# Altium PCB PCB1.PcbDoc
Units mm, origin at the board's own origin, x right, y up, seen from the top; angles counter-clockwise.
Board outline 100 x 100 mm, 2 copper layers (Top Layer, Bottom Layer); 47 components, 30 nets, 179 pads, 1 vias.
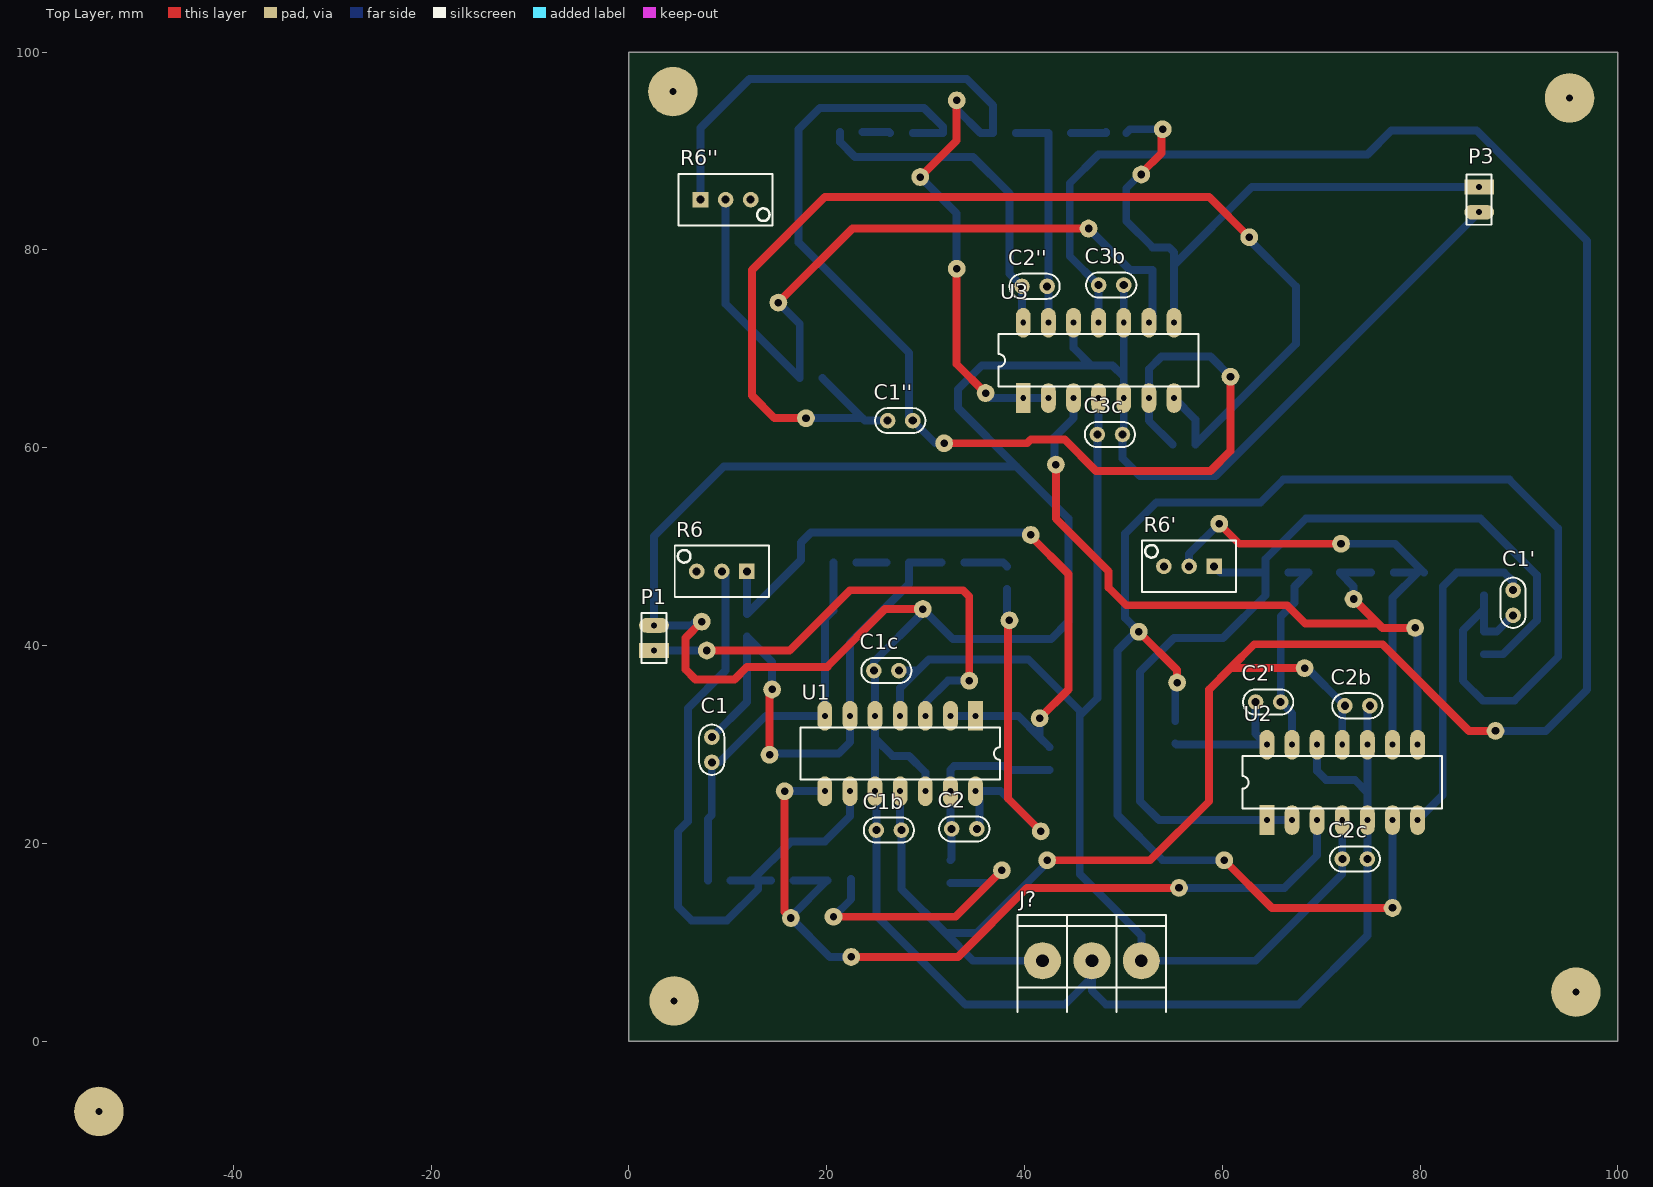
[diagram p0: Top Layer view]
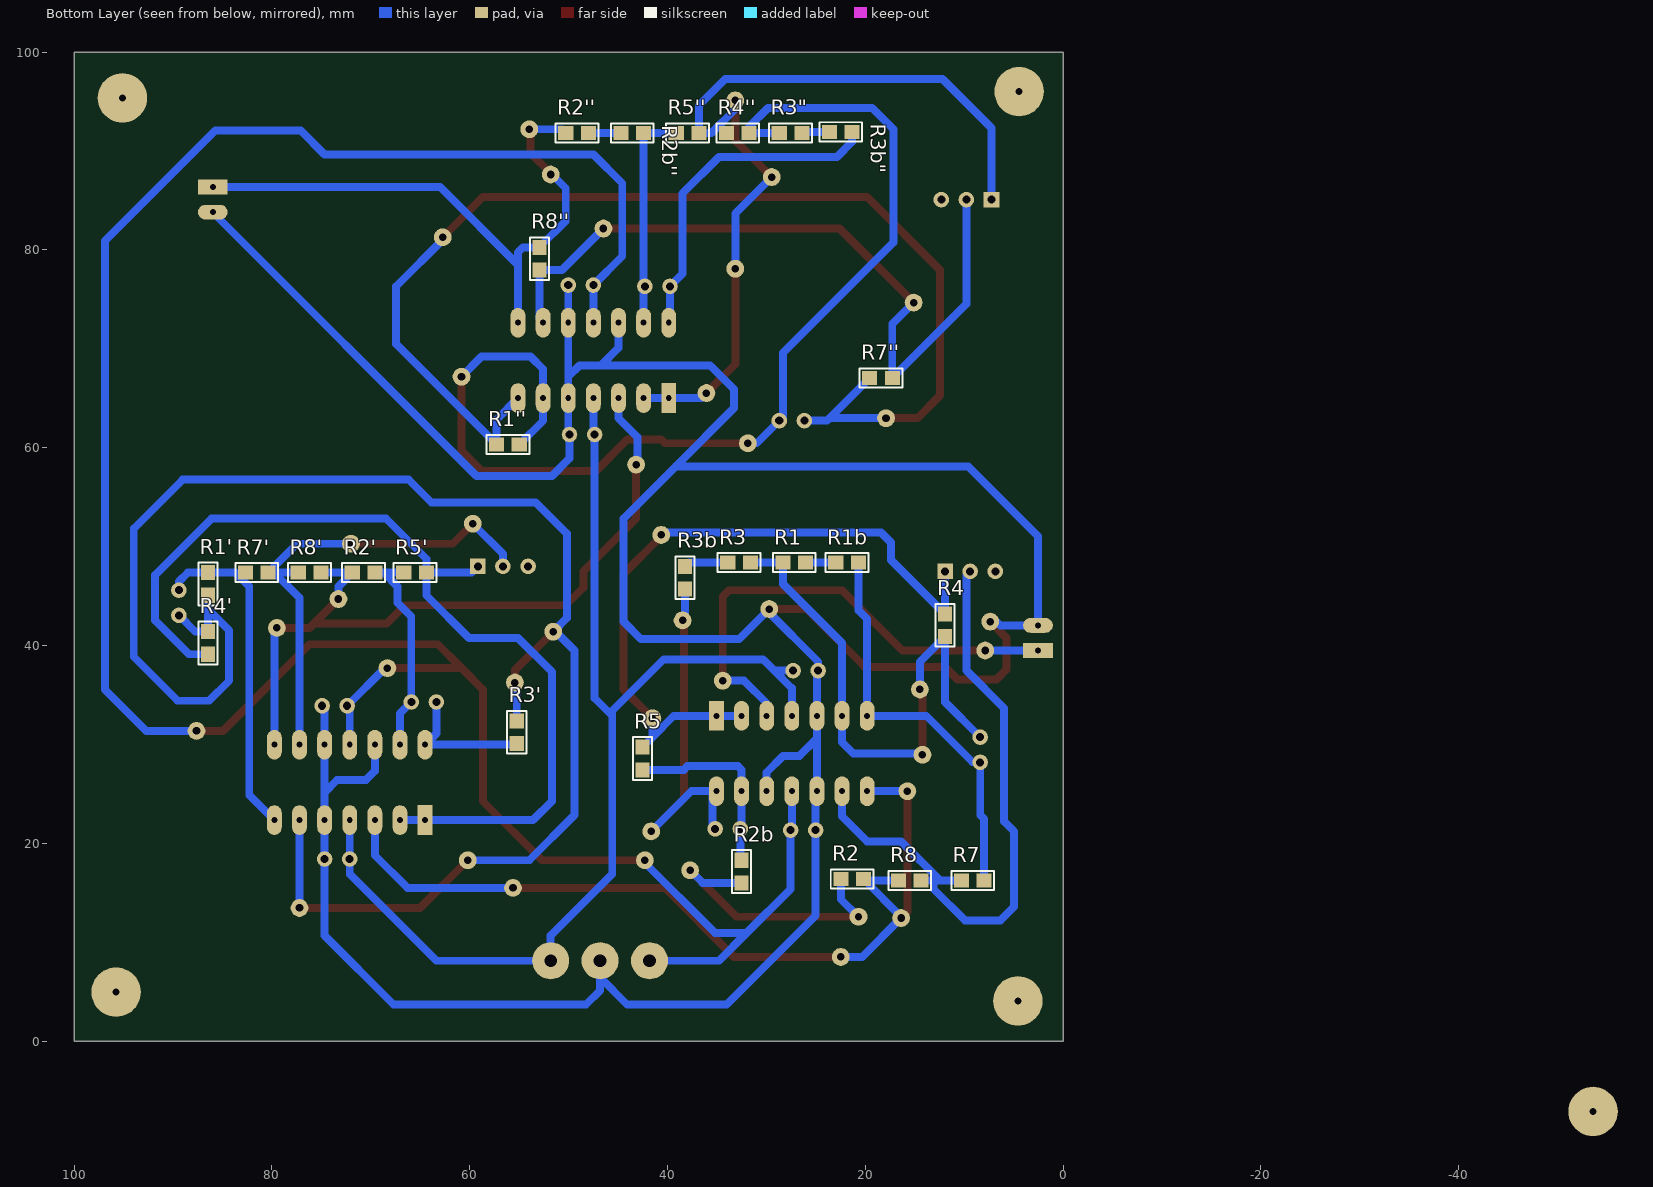
[diagram p1: Bottom Layer view, seen from below]
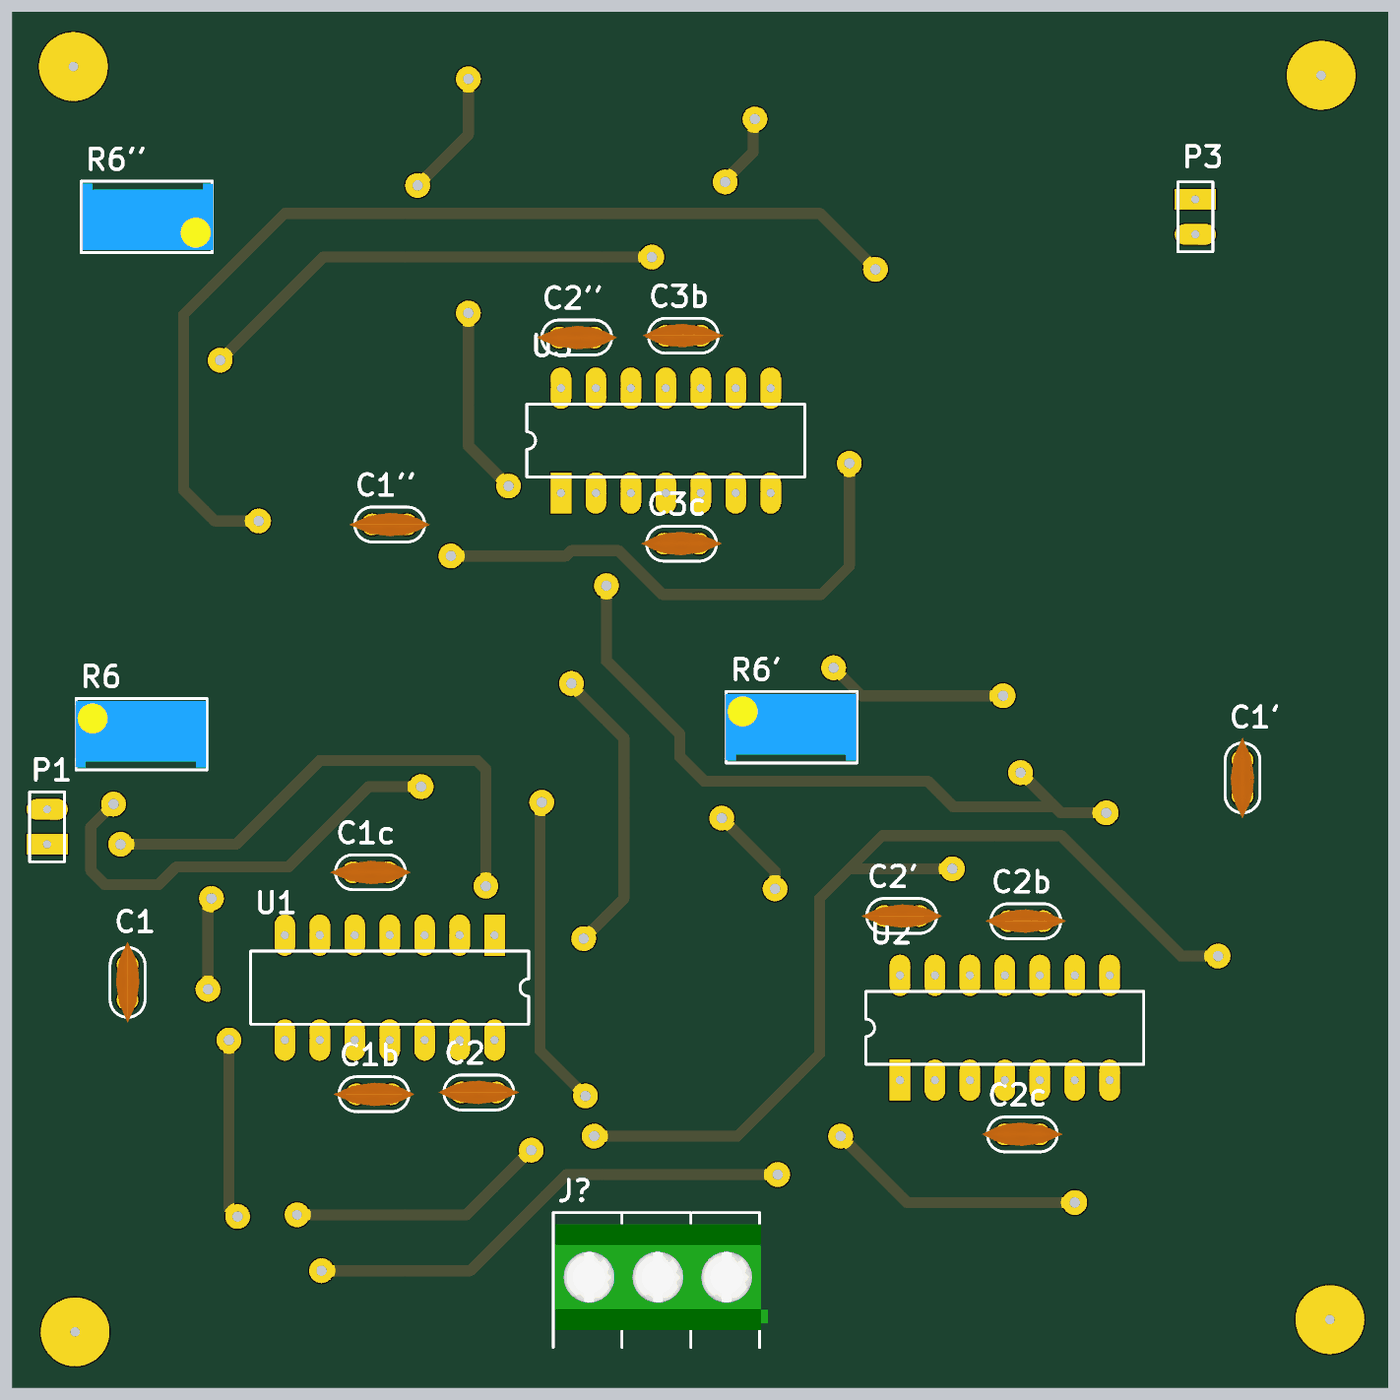
[diagram p2: 3D render of the assembled board from above, using the file's embedded part models]
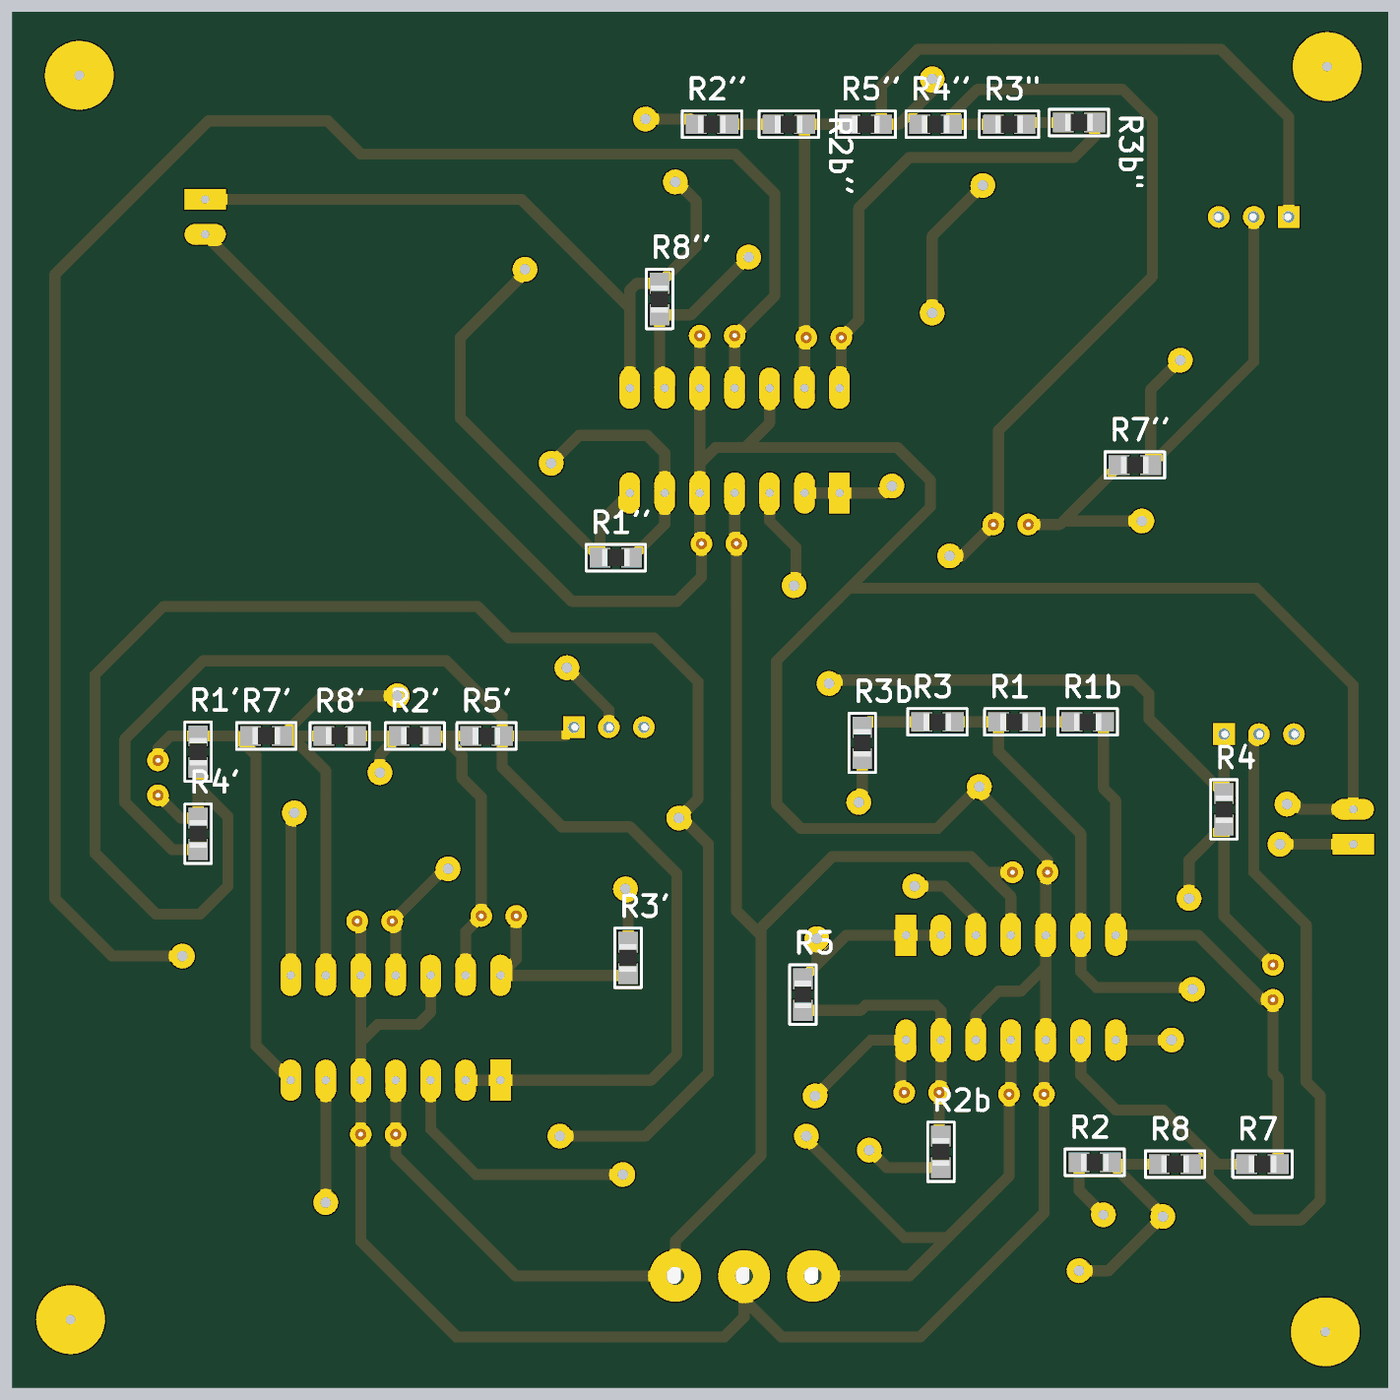
[diagram p3: 3D render of the assembled board from below, using the file's embedded part models]

## Layer stack, top to bottom
Top Solder: solder mask 0.0102, Solder Resist, Dk 3.5
Top Layer: signal copper 0.0356
Dielectric 1: dielectric 0.32, FR-4, Dk 4.8
Bottom Layer: signal copper 0.0356
Bottom Solder: solder mask 0.0102, Solder Resist, Dk 3.5

## Board outline
100,0 100,100 0,100 0,0

## Design rules (kind name [scope] priority, off if disabled: settings)
Clearance [All] p1: gap=0.3 ignorepadtopadclearanceinfootprint=FALSE
PolygonConnect [All] p1: connectstyle=Relief reliefconductorwidth=0.254 reliefentries=4 polygonreliefangle="90 Angle" airgapwidth=0.254
RoutingVias [All] p1: holewidth=0.5 width=2 viastyle="Through Hole" minholewidth=0.3 minwidth=1.5 maxholewidth=0.5 maxwidth=2
SolderMaskExpansion [All] p1: expansion=0.102
Width [All] p1: maxlimit=0.8 minlimit=0.8 preferedwidth=0.8
30 further rules are at their usual default settings.

## Classes and differential pairs
component class Sheet1: C1 C1b C1c C2 C2b C2c C3b C3c J? P1 R1 R1b R2 R2b R3 R3b R4 R5 R6 R7 R8 U1
component class Sheet2: C1' C2' R1' R2' R3' R4' R5' R6' R7' R8' U2
component class Sheet3: C1'' C2'' P3 R1'' R2'' R2b'' "R3\"" "R3b\"" R4'' R5'' R6'' R7'' R8'' U3

## Components (designator, comment, footprint, x,y, rotation, side; value= is the part's Value field where it differs from the comment)
C1 "1n" CAP100 8.382,29.464 r270 top
C1' "4.7n" CAP100 89.408,44.323 r90 top
C1'' "1n" CAP100 27.432,62.738 r180 top
C1b "100n" CAP100 26.289,21.336 r180 top
C1c "100n" CAP100 26.035,37.465 r180 top
C2 "1n" CAP100 33.909,21.463 r0 top
C2' "4.7n" CAP100 64.643,34.29 r180 top
C2'' "1n" CAP100 41.021,76.327 r180 top
C2b "100n" CAP100 73.66,33.909 r0 top
C2c "100n" CAP100 73.406,18.415 r0 top
C3b "100n" CAP100 48.768,76.454 r0 top
C3c "100n" CAP100 48.641,61.341 r0 top
J? "BORNERA ALIMENTACION" BORNERA3 46.816,8.128 r270 top
P1 "Signal IN" HDR1X2 2.54,39.497 r90 top
P3 "signal OUT" HDR1X2 85.979,86.36 r270 top
R1 "15K" 0805 27.178,48.387 r180 bottom
R1' "5.6k" 0805 86.487,46.228 r90 bottom
R1'' "20k" 0805 56.134,60.325 r0 bottom
R1b "1.3K" 0805 21.844,48.387 r180 bottom
R2 "3K" 0805 21.336,16.383 r0 bottom
R2' "680" 0805 70.739,47.371 r180 bottom
R2'' "2.7k" 0805 49.149,91.821 r180 bottom
R2b "82" 0805 32.512,17.145 r90 bottom
R2b'' "100" 0805 43.561,91.821 r180 bottom
R3 "3K" 0805 32.766,48.387 r0 bottom
"R3\"" "2.7k" 0805 27.559,91.821 r180 bottom
R3' "680" 0805 55.245,31.242 r270 bottom
R3b "82" 0805 38.227,46.863 r270 bottom
"R3b\"" "100" 0805 22.479,91.948 r180 bottom
R4 "20K" 0805 11.938,42.037 r270 bottom
R4' "7.5k" 0805 86.487,40.259 r90 bottom
R4'' "22K" 0805 32.893,91.821 r180 bottom
R5 "3K" 0805 42.545,28.575 r270 bottom
R5' "680" 0805 65.532,47.371 r0 bottom
R5'' "3K" 0805 37.973,91.821 r0 bottom
R6 "5k" "PRESET V" 9.398,47.498 r180 top
R6' "1k" "PRESET V" 56.642,48.006 r180 top
R6'' "5k" "PRESET V" 9.779,85.09 r0 top
R7 "3K" 0805 9.144,16.256 r0 bottom
R7' "560" 0805 81.534,47.371 r180 bottom
R7'' "3.3k" 0805 18.415,67.056 r180 bottom
R8 "3K" 0805 15.494,16.256 r0 bottom
R8' "560" 0805 76.2,47.371 r180 bottom
R8'' "3.3k" 0805 52.959,79.121 r90 bottom
U1 "TL084J" J014 27.432,29.083 r180 top
U2 "TL084J" J014 72.136,26.162 r0 top
U3 "TL084J" J014 47.498,68.834 r0 top

## Footprints (in the part's own frame and the unit in brackets; to place one, negate y for a bottom-side part, rotate by r counter-clockwise, add the part's x,y. Pads: shape width x height; smd on the part's side, far side on the other; paste and mask are expansions set on the pad)
0805 [mil] "Pasivo 0805"
  rect 60x56 smd: 1(-45,0) 2(45,0)
  silkscreen extent -85,-38 85,38, body extent -39,-25 39,25, height 15
BORNERA3 [mm] "Bornera con Tornillos 5mm separación"
  round 3.75 hole 1.3: 1(0,5) 2(0,0) 3(0,-5)
  silkscreen extent -4.6,-7.5 5.2,7.5, body extent -3.76,-7.39 3.94,8.11, height 10.05
CAP100 [mil]
  round 62 hole 32: 1(-50,0) 2(50,0)
  silkscreen extent -100,-50 100,50, body extent -115,-33 115,34, height 241
HDR1X2 [mm] "Connector; Header; 2 Position"
  rect 1.5x3 hole 0.6: 1(0,0)
  oval 1.5x3 hole 0.6: 2(2.54,0)
  silkscreen extent -1.27,-1.27 3.81,1.27
J014 [mm] "DIP; 14 Leads; Row Spacing 7.62 mm; Pitch 2.54 mm"
  rect 1.5x3 hole 0.6: 1(-7.62,-3.81)
  oval 1.5x3 hole 0.6: 2(-5.08,-3.81) 3(-2.54,-3.81) 4(0,-3.81) 5(2.54,-3.81) 6(5.08,-3.81) 7(7.62,-3.81) 8(7.62,3.81) 9(5.08,3.81) 10(2.54,3.81) 11(0,3.81) 12(-2.54,3.81) 13(-5.08,3.81) 14(-7.62,3.81)
  silkscreen extent -10.1,-2.65 10.1,2.65
"PRESET V" [mil]
  rect 62x62 hole 32: 1(-100,0)
  round 62 hole 32: 2(0,0) 3(100,0)
  silkscreen extent -188,-102 188,102, body extent -185,-95 190,95, height 455

## Part data
C1 C1' C1'' C1b C1c C2 C2' C2'' C2b C2c C3b C3c: library part CAP
J?: library part "BORNERA 3"
P1 P3: library part "Header 2", "Header, 2-Pin", LatestRevisionDate=17-Jul-2002, LatestRevisionNote="Re-released for DXP Platform.", Publisher="Altium Limited"
R1 R1' R1'' R1b R2 R2' R2'' R2b R2b'' R3 "R3\"" R3' R3b "R3b\"" R4 R4' R4'' R5 R5' R5'' R7 R7' R7'' R8 R8' R8'': library part RES
R6 R6' R6'': library part PRESET
U1 U2 U3: "JFET-Input Operational Amplifier", ComponentLink1Description="Manufacturer Link", ComponentLink1URL=http://www.ti.com/, ComponentLink2Description=Datasheet, ComponentLink2URL=http://www-s.ti.com/sc/ds/tl084.pdf, DatasheetVersion=Feb-1999, LatestRevisionDate=04-Mar-2005, LatestRevisionNote="Stylized 3D Model Added.", PackageDescription="DIP; 14 Leads; Row Spacing 7.62 mm; Pitch 2.54 mm", PackageReference=J014, PackageVersion=Jun-1999, Published=16-Jan-2001, Publisher="Altium Limited"

## Free pads (board coordinates)
  round 1.8 hole 0.762: 2(37.719,17.272) 4(15.748,25.273) 6(16.383,12.446) 7(41.656,21.209) 8(38.481,42.545) 9(38.481,42.545) 10(14.224,28.956) 11(14.478,35.56) 12(29.718,43.688) 13(34.417,36.449) 14(7.874,39.497) 15(7.366,42.418) 17(41.529,32.639) 22(22.479,8.509) 23(55.626,15.494) 24(42.291,18.288) 25(68.326,37.719) 26(79.502,41.783) 27(73.279,44.704) 28(72.009,50.292) 30(59.69,52.324) 31(55.435,36.258) 32(77.216,13.462) 35(60.198,18.288) 36(51.562,41.402) 37(40.64,51.181) 38(43.18,58.293) 39(46.482,82.169) 40(15.113,74.676) 41(31.877,60.452) 42(60.833,67.183) 43(62.738,81.28) 44(17.907,62.992) 45(36.068,65.532) 46(33.147,78.105) 48(29.464,87.376) 49(33.147,95.123) 50(87.63,31.369) 51(51.816,87.63) 53(53.975,92.202)
  round 5 hole 0.7: 54(-53.594,-7.112) 54(4.445,96.012) 54(4.572,4.064) 54(95.123,95.377) 54(95.758,4.953)

## Via types
v1: diameter 1.8, hole 0.711, Top Layer to Bottom Layer, 1 vias

## Nets (pads, with @x,y where several pads share a name; then routed paths per layer and width w, separated by ;. In a path a pad name is that pad's centre, name@x,y a point inside that pad or via, vN(x,y) a via of type N, cw(c..) or ccw(c..) an arc to the next point about the centre after c; other vN are vias at no path point)
GND: C1b.2 C1c.2 C2b.2 C2c.2 C3b.2 C3c.2 J?.2 P1.2 P3.2 pad.12 pad.15 U1.5 U1.10 U1.12 U2.5 U2.10 U2.12 U3.5 U3.10 U3.12 | length 354.4
  Top Layer w0.8: pad.15 5.715,40.767 5.715,37.592 6.731,36.576 10.668,36.576 11.938,37.846 20.066,37.846 25.908,43.688 pad.12
  Bottom Layer w0.8: pad.15@7.112,42.799 6.35,42.037 P1.2 2.54,51.054 9.588,58.102 39.179,58.102 ; pad.12 pad.12@29.845,43.561 ; U1.12 29.972,27.178 28.321,28.829 26.67,28.829 24.892,30.607 ; U3.12 44.958,70.104 46.736,68.326 ; J?.2 J?.2@46.816,6.43 ; C3b.2 U3.10 50.038,67.183 ; U2.12 69.596,27.305 70.485,26.416 73.406,26.416 74.676,25.146 ; C2b.2 74.676,33.655 U2.10 74.676,25.146 ; P3.2 59.309,57.15 51.689,57.15 49.911,58.928 C3c.2 50.038,61.468 U3.5 50.038,67.183 ; 24.892,30.607 U1.5 24.892,37.338 C1c.2 24.765,38.354 29.845,43.434 pad.12@29.845,43.561 ; 24.892,30.607 U1.10 25.019,25.146 C1b.2 25.019,12.7 34.036,3.683 44.069,3.683 J?.2@46.816,6.43 ; pad.12@29.845,43.561 32.766,40.64 42.672,40.64 44.45,42.418 44.45,52.832 39.179,58.102 ; 39.179,58.102 33.274,64.008 33.274,65.913 35.687,68.326 46.736,68.326 ; 46.736,68.326 48.895,68.326 50.038,67.183 ; J?.2@46.816,6.43 46.816,5.127 48.26,3.683 67.691,3.683 74.676,10.668 C2c.2 U2.5 74.676,25.146
NetC1''_1: "R3\".1" C1''.1 pad.41 pad.42 R1''.1 R4''.2 U3.6 | length 115.4
  Top Layer w0.8: pad.41 40.259,60.452 40.64,60.833 44.069,60.833 47.244,57.658 58.801,57.658 60.833,59.69 pad.42
  Bottom Layer w0.8: 28.702,91.821 R4''.2 31.75,92.456 29.845,94.361 19.304,94.361 17.145,92.202 17.145,80.772 28.321,69.596 28.321,63.119 C1''.1 30.988,60.452 pad.41 ; R1''.1 52.578,62.738 U3.6 52.578,67.945 53.848,69.215 58.801,69.215 pad.42
NetC1''_2: C1''.2 pad.43 pad.44 R1''.2 R7''.1 U3.7 | length 120.9
  Top Layer w0.8: pad.44 14.732,62.992 12.446,65.278 12.446,77.978 19.812,85.344 58.674,85.344 pad.43
  Bottom Layer w0.8: pad.44 23.622,62.992 ; R7''.1 23.622,62.992 ; C1''.2 23.876,62.738 23.622,62.992 ; U3.7 57.277,62.865 R1''.2 67.437,70.485 67.437,76.327 pad.43@62.611,81.153
NetC1'_1: C1'.1 pad.31 pad.32 pad.35 pad.36 R1'.1 R3'.1 R4'.2 U2.6 | length 170.5
  Top Layer w0.8: pad.36 55.435,37.529 pad.31 ; pad.35 65.024,13.462 pad.32
  Bottom Layer w0.8: pad.36 pad.36@51.435,41.529 ; R3'.1 55.245,36.068 pad.31 pad.31@55.626,36.449 ; pad.35 53.975,18.288 49.403,22.86 49.403,39.497 pad.36@51.435,41.529 ; pad.32 U2.6 ; pad.32@77.47,13.589 pad.32@77.47,13.716 ; R1'.1 86.487,43.688 ; C1'.1 87.757,41.402 R4'.2 86.487,43.688 ; pad.36@51.435,41.529 50.165,42.799 50.165,51.308 53.34,54.483 63.881,54.483 66.167,56.769 89.027,56.769 93.98,51.816 93.98,38.862 89.535,34.417 86.36,34.417 84.328,36.449 84.328,41.529 86.487,43.688
NetC1'_2: C1'.2 R1'.2 R7'.1 U2.7 | length 33.6
  Bottom Layer w0.8: U2.7 82.296,24.892 82.296,45.974 83.693,47.371 R1'.2 88.519,47.371 89.408,46.482 C1'.2
NetC1_1: C1.1 pad.10 pad.11 R1.1 R3.1 R4.2 U1.6 | length 57.3
  Top Layer w0.8: pad.10 14.224,35.56 pad.11
  Bottom Layer w0.8: C1.1 11.938,34.29 R4.2 14.478,38.354 pad.11 ; pad.10@14.351,29.083 21.209,29.083 22.352,30.226 U1.6 22.352,40.259 28.321,46.228 R1.1 R3.1
NetC1_2: C1.2 R1b.2 R7.1 U1.7 | length 41.3
  Bottom Layer w0.8: R7.1 8.001,22.479 8.382,22.86 C1.2 9.144,28.194 13.843,32.893 U1.7 19.812,42.672 20.701,43.561 R1b.2
NetC2''_1: C2''.1 R2b''.2 R5''.2 U3.13 | length 22.6
  Bottom Layer w0.8: R5''.2 R2b''.2 42.418,76.454 C2''.1 42.418,76.2 U3.13
NetC2''_2: "R3b\".2" C2''.2 U3.14 | length 34
  Bottom Layer w0.8: 21.336,91.948 21.336,90.932 22.86,89.408 34.798,89.408 38.481,85.725 38.481,77.597 C2''.2 39.751,72.771 U3.14
NetC2'_1: C2'.1 R2'.2 R5'.2 U2.13 | length 21.1
  Bottom Layer w0.8: R5'.2 68.707,47.371 67.31,45.974 67.31,44.323 65.913,42.926 C2'.1 67.056,33.147 U2.13
NetC2'_2: C2'.2 R3'.2 U2.14 | length 14.1
  Bottom Layer w0.8: R3'.2 55.372,29.972 U2.14 63.373,31.115 C2'.2
NetC2_1: C2.1 R2b.2 R5.2 U1.13 | length 19.6
  Bottom Layer w0.8: R2b.2 32.639,18.415 C2.1 32.512,21.59 U1.13 32.512,27.432 32.893,27.813 37.973,27.813 38.354,27.432 R5.2
NetC2_2: C2.2 pad.7 pad.8 pad.9 R3b.2 U1.14 | length 38.1
  Top Layer w0.8: pad.8@38.354,42.418 38.354,24.511 pad.7
  Bottom Layer w0.8: C2.2 35.433,21.717 35.433,24.892 U1.14 37.592,25.273 pad.7 ; pad.8@38.227,42.545 R3b.2
NetR1_2: R1.2 R1b.1 | length 3
  Bottom Layer w0.8: R1b.1 R1.2
NetR2''_2: R2''.2 R2b''.1 | length 3.7
  Bottom Layer w0.8: R2b''.1 R2''.2 48.26,91.821 R2''.2@48.26,91.948
NetR2'_1: pad.26 pad.27 pad.38 R2'.1 R8'.2 U2.8 U3.3 | length 76.5
  Top Layer w0.8: pad.38 43.18,52.832 48.514,47.498 48.514,45.847 50.292,44.069 66.548,44.069 68.389,42.227 75.755,42.227 ; pad.27 75.755,42.227 ; pad.26 76.2,41.783 75.755,42.227
  Bottom Layer w0.8: pad.38@43.053,58.547 43.053,61.087 44.958,62.992 U3.3 ; pad.27 73.279,45.974 R2'.1 R8'.2 ; U2.8 pad.26@79.756,41.91
NetR2_1: pad.4 pad.6 pad.22 pad.23 R2.1 R8.2 U1.8 U2.3 | length 88.9
  Top Layer w0.8: pad.4 15.748,13.081 pad.6 ; pad.22 33.274,8.509 40.259,15.494 pad.23
  Bottom Layer w0.8: pad.4@15.494,25.019 pad.4 U1.8 ; R8.2 20.066,16.256 16.383,12.573 pad.6 20.32,8.509 pad.22 ; pad.23 66.294,15.494 69.596,18.796 U2.3
NetR2_2: pad.2 R2.2 R2b.1 | length 29.2
  Top Layer w0.8: v1(20.701,12.573) 33.02,12.573 pad.2
  Bottom Layer w0.8: v1(20.701,12.573) 22.479,14.351 R2.2 ; R2b.1 36.449,16.002 pad.2
"NetR3\"_2": "R3\".2" "R3b\".1" | length 2.8
  Bottom Layer w0.8: 23.622,91.948 26.289,91.948 26.416,91.821
NetR3_2: R3.2 R3b.1 | length 4.5
  Bottom Layer w0.8: R3.2 37.846,48.387 R3b.1
NetR4''_1: pad.45 pad.46 pad.48 pad.49 R4''.1 R5''.1 R6''.1 U3.1 U3.2 | length 88.9
  Top Layer w0.8: pad.48 33.147,91.059 pad.49 ; pad.46 33.147,68.453 pad.45
  Bottom Layer w0.8: R6''.1 7.239,92.329 12.192,97.282 34.163,97.282 36.83,94.615 R5''.1 35.56,91.821 33.147,94.234 pad.49 ; pad.48@29.337,87.503 pad.48 33.147,83.693 pad.46 ; pad.45 36.576,65.024 U3.1 U3.2
NetR4'_1: R4'.1 R5'.1 R6'.1 U2.1 U2.2 | length 97.1
  Bottom Layer w0.8: R6'.1 59.817,47.371 R5'.1 ; U2.2 U2.1 53.594,22.352 51.689,24.257 51.689,37.338 55.118,40.767 60.071,40.767 64.389,45.085 R5'.1 ; R4'.1 88.392,39.116 91.821,42.545 91.821,47.117 86.106,52.832 68.453,52.832 64.389,48.768 R5'.1
NetR4_1: pad.17 pad.37 R4.1 R5.1 R6.1 U1.1 U1.2 | length 72.1
  Top Layer w0.8: pad.37 40.64,51.054 44.45,47.244 44.45,35.56 pad.17
  Bottom Layer w0.8: R6.1 R4.1 17.399,48.641 17.399,50.419 18.415,51.435 pad.37@40.64,51.435 ; U1.2 U1.1 39.37,32.893 41.529,30.734 ; pad.17 41.529,30.734 ; R5.1 41.529,30.734
NetR6''_2: pad.39 pad.40 R6''.2 R7''.2 R8''.1 U3.9 | length 78
  Top Layer w0.8: pad.40 22.606,82.169 pad.39
  Bottom Layer w0.8: R6''.2 9.779,74.549 R7''.2 17.272,72.517 pad.40 ; pad.39@46.355,82.296 pad.39 50.673,77.978 R8''.1 52.959,73.025 U3.9
NetR6'_2: pad.28 pad.30 R6'.2 R7'.2 R8'.1 U2.9 | length 49.5
  Top Layer w0.8: pad.30 61.722,50.292 pad.28
  Bottom Layer w0.8: R6'.2 56.642,49.276 pad.30 ; pad.28@71.882,50.673 72.263,50.292 77.47,50.292 R7'.2 ; U2.9 77.216,44.831 79.756,47.371 R8'.1
NetR6_2: R6.2 R7.2 R8.1 U1.9 | length 66.2
  Bottom Layer w0.8: R6.2 9.779,47.117 9.779,37.465 5.969,33.655 5.969,22.225 4.953,21.209 4.953,13.589 6.35,12.192 9.906,12.192 13.081,15.367 13.081,16.256 ; R7.2 12.446,16.256 ; R8.1 13.081,16.256 ; U1.9 22.352,22.733 19.812,20.193 16.383,20.193 12.446,16.256 ; 12.446,16.256 13.081,16.256
VCC+: C1c.1 C2c.1 C3c.1 J?.1 U1.4 U2.4 U3.4 | length 116.4
  Bottom Layer w0.8: C1c.1 29.21,37.465 ; U1.4 27.432,35.687 29.21,37.465 ; U3.4 47.498,61.468 C3c.1 47.371,34.671 45.593,32.893 ; U2.4 C2c.1 72.136,16.891 63.373,8.128 J?.1 51.816,10.668 45.593,16.891 45.593,32.893 ; 29.21,37.465 30.353,38.608 40.386,38.608 45.593,33.401 45.593,32.893
VCC-: C1b.1 C2b.1 C3b.1 J?.3 pad.24 pad.25 pad.50 U1.11 U2.11 U3.11 | length 253.4
  Top Layer w0.8: pad.24 52.705,18.288 58.674,24.257 58.674,35.56 60.833,37.719 ; pad.25 60.833,37.719 ; pad.50 84.963,31.369 76.2,40.132 63.246,40.132 60.833,37.719
  Bottom Layer w0.8: U1.11 27.432,21.463 C1b.1 27.559,15.367 32.004,10.922 ; J?.3 34.798,8.128 32.004,10.922 ; pad.24@42.545,18.288 35.179,10.922 32.004,10.922 ; U3.11 C3b.1 44.577,79.375 44.577,86.741 47.498,89.662 74.676,89.662 77.089,92.075 85.725,92.075 96.901,80.899 96.901,35.56 92.71,31.369 pad.50 ; pad.25 68.58,37.719 C2b.1 72.136,33.655 U2.11
Vin: P1.1 pad.13 pad.14 U1.3 | length 49.8
  Top Layer w0.8: pad.14 16.256,39.497 22.352,45.593 33.782,45.593 34.417,44.958 pad.13
  Bottom Layer w0.8: P1.1 pad.14 ; U1.3 29.972,34.163 32.258,36.449 pad.13
VOUT: P3.1 pad.51 pad.53 R2''.1 R8''.2 U3.8 | length 61.5
  Top Layer w0.8: pad.51 51.816,87.757 53.848,89.789 pad.53@53.848,91.948
  Bottom Layer w0.8: R2''.1 50.673,92.202 pad.53 ; pad.51@51.562,87.503 50.292,86.233 50.292,82.931 R8''.2 54.61,80.264 55.118,79.756 55.118,78.486 ; U3.8 55.118,78.486 ; P3.1 62.992,86.36 55.118,78.486
pads on no net: R6''.3 R6'.3 R6.3